# Altium PCB ADA.PcbDoc (part 1 of 3)
Units mm, origin at the board's own origin, x right, y up, seen from the top; angles counter-clockwise.
Board outline 200 x 100 mm, 2 copper layers (Top Layer, Bottom Layer); 139 components, 141 nets, 517 pads, 145 vias.
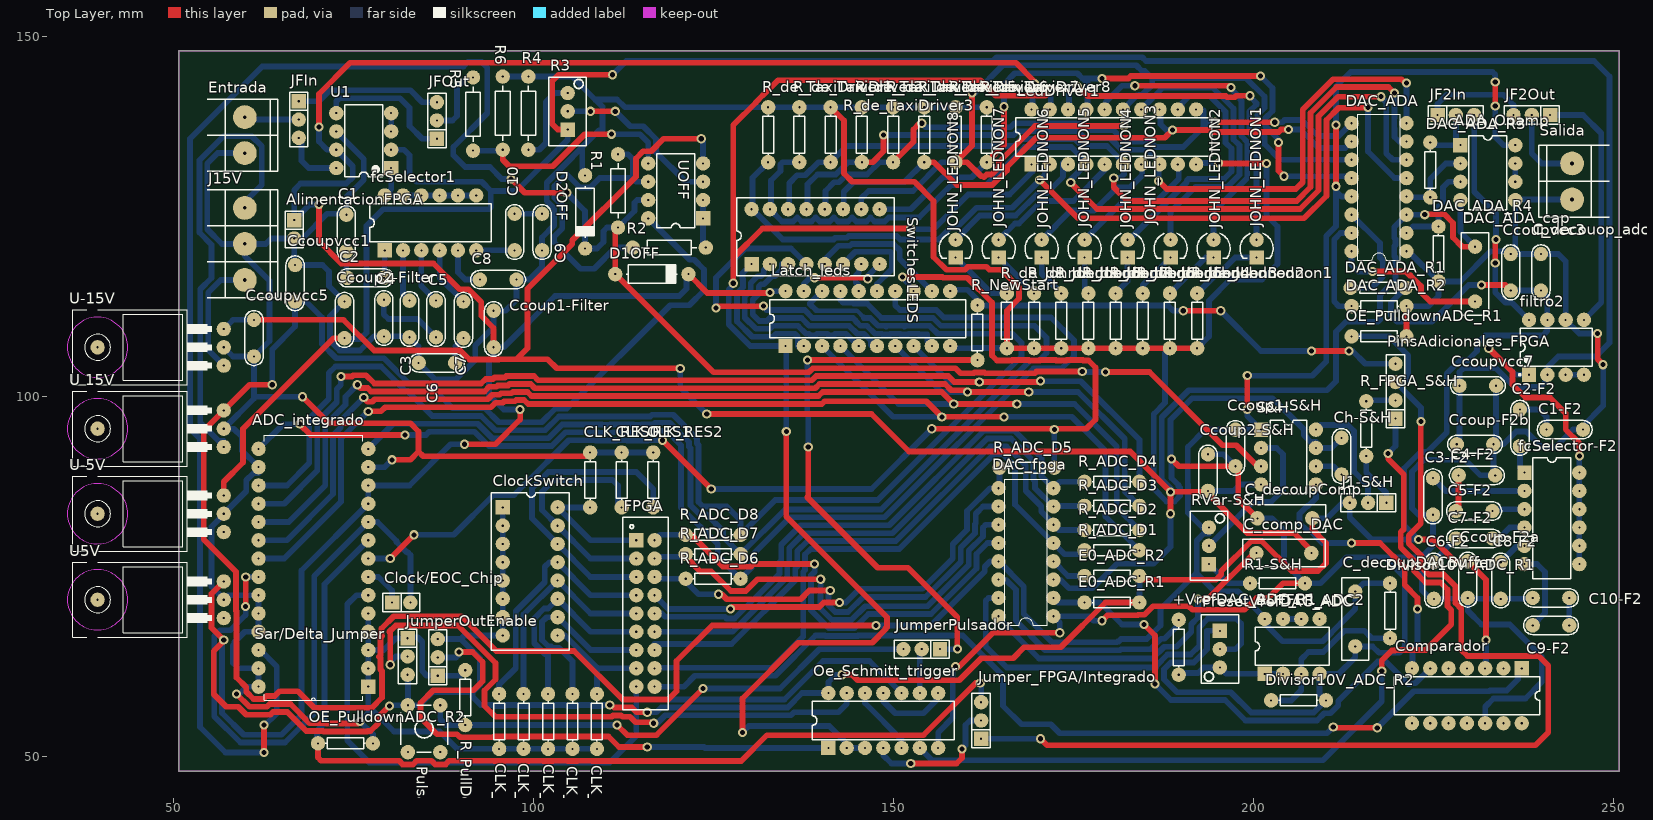
[diagram p0: Top Layer view]
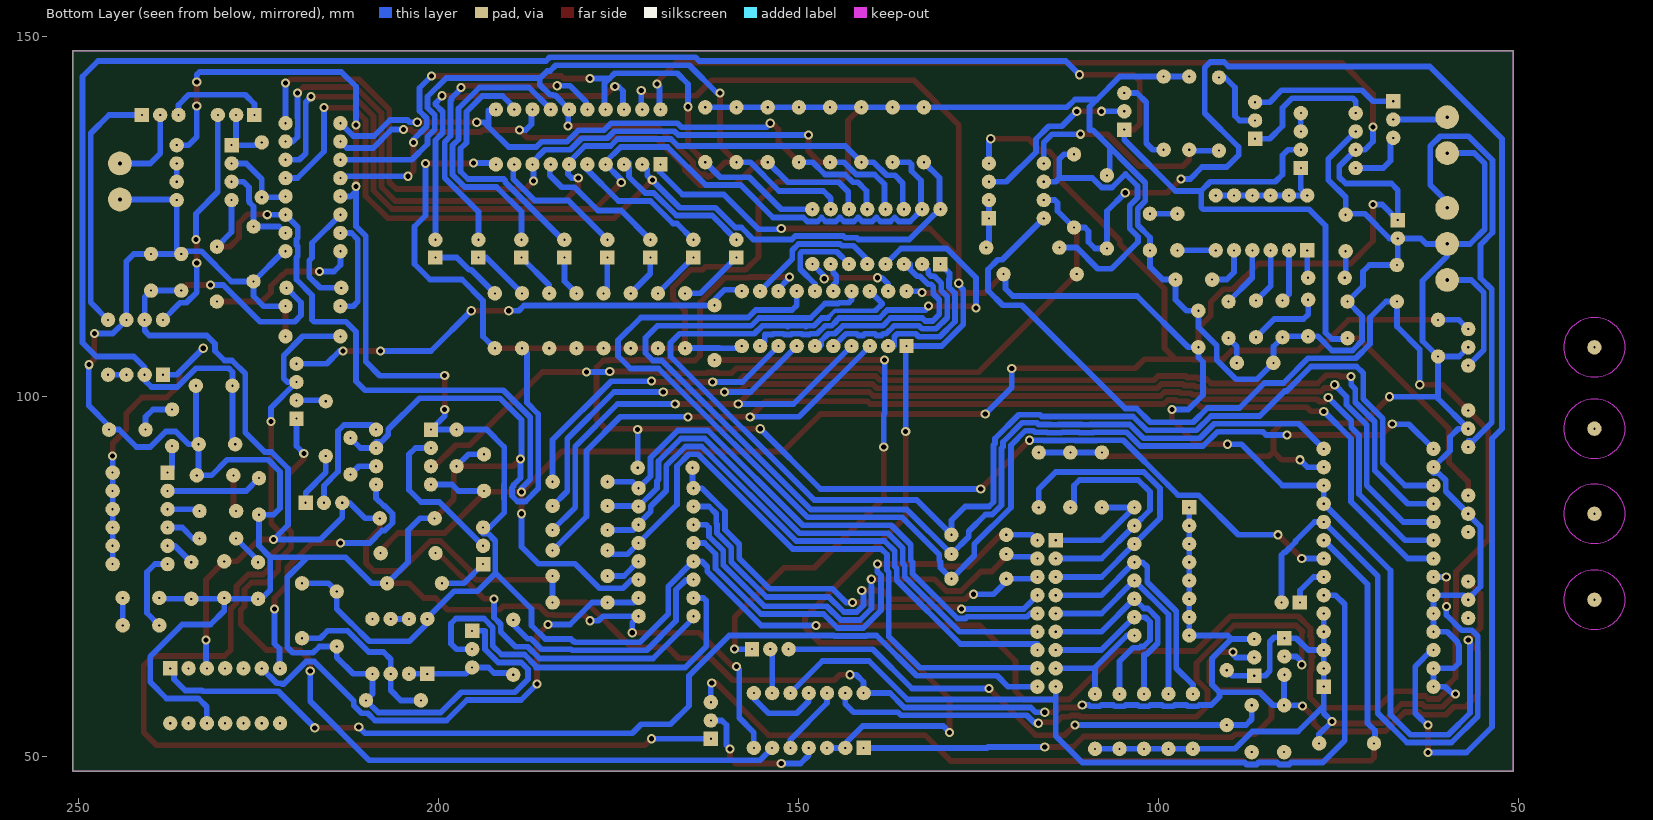
[diagram p1: Bottom Layer view, seen from below]

## Layer stack, top to bottom
Top Solder: solder mask 0.0102, Solder Resist, Dk 3.5
Top Layer: signal copper 0.0356
Dielectric 1: dielectric 0.32, FR-4, Dk 4.8
Bottom Layer: signal copper 0.0356
Bottom Solder: solder mask 0.0102, Solder Resist, Dk 3.5

## Board outline
250.762,47.968 250.762,147.968 50.762,147.968 50.762,47.968

## Design rules (kind name [scope] priority, off if disabled: settings)
Clearance [All] p1: gap=0.3 ignorepadtopadclearanceinfootprint=FALSE
PolygonConnect [All] p1: connectstyle=Relief reliefconductorwidth=0.254 reliefentries=4 polygonreliefangle="90 Angle" airgapwidth=0.254
RoomDefinition Latch-LEDS [InComponentClass('Latch-LEDS')] p1: confinementstyle=ConfineIn formatcopy=TRUE lockcomponents=FALSE outline 205.232,147.955 126.383,147.955 126.383,100 205.232,100
RoomDefinition ADC_FPGA [InComponentClass('ADC_FPGA')] p2: confinementstyle=ConfineIn formatcopy=TRUE lockcomponents=FALSE outline 106.68,48.641 240.665,48.641 240.665,106.426 106.68,106.426
RoomDefinition OFFSET [InComponentClass('OFFSET')] p3: confinementstyle=ConfineIn formatcopy=TRUE lockcomponents=FALSE outline 89.789,148.336 89.789,107.823 129.413,107.823 129.413,148.336
RoomDefinition FR [InComponentClass('FR')] p4: confinementstyle=ConfineIn formatcopy=TRUE lockcomponents=FALSE outline 220.853,66.294 248.412,66.294 248.412,113.665 220.853,113.665
RoomDefinition FAA [InComponentClass('FAA')] p5: confinementstyle=ConfineIn formatcopy=TRUE lockcomponents=FALSE outline 103.886,101.981 103.886,140.843 70.358,140.843 70.358,101.981
RoutingVias [All] p1: holewidth=0.711 width=1.9 viastyle="Through Hole" minholewidth=0.711 minwidth=1.8 maxholewidth=0.711 maxwidth=2
SolderMaskExpansion [All] p1: expansion=0.102
Width [All] p1: maxlimit=0.9 minlimit=0.6 preferedwidth=0.8
30 further rules are at their usual default settings.

## Classes and differential pairs
component class ADC_FPGA: +VrefDAC_ADC_R1 BUFFER_ADC2 C_comp_DAC C_decoupComp C_decoupDACBuffer Ccoup1-S&H Ccoup2-S&H Ch-S&H Comparador Divisor10V_ADC_R1 Divisor10V_ADC_R2 E0_ADC_R1 E0_ADC_R2 FPGA J1-S&H PinsAdicionales_FPGA PresetVrefDAC_ADC R1-S&H R_ADC_D1 R_ADC_D2 R_ADC_D3 R_ADC_D4 R_ADC_D6 R_ADC_D7 R_ADC_D8 R_FPGA_S&H RVar-S&H S&H
component class FAA: C1 C2 C3 C4 C5 C6 C7 C8 C9 C10 Ccoup1-Filter Ccoup2-Filter fcSelector1 U1
component class FR: C1-F2 C2-F2 C3-F2 C4-F2 C5-F2 C6-F2 C7-F2 C8-F2 C9-F2 C10-F2 Ccoup-F2a Ccoup-F2b fcSelector-F2 filtro2
component class Latch-LEDS: JOHN_LEDNON1 JOHN_LEDNON2 JOHN_LEDNON3 JOHN_LEDNON4 JOHN_LEDNON5 JOHN_LEDNON6 JOHN_LEDNON7 JOHN_LEDNON8 Latch_leds LedDriver1 R_de_JohnLednon1 R_de_JohnLednon2 R_de_JohnLednon3 R_de_JohnLednon4 R_de_JohnLednon5 R_de_JohnLednon6 R_de_JohnLednon7 R_de_JohnLednon8 R_de_TaxiDriver1 R_de_TaxiDriver2 R_de_TaxiDriver3 R_de_TaxiDriver4 R_de_TaxiDriver5 R_de_TaxiDriver6 R_de_TaxiDriver7 R_de_TaxiDriver8 SwitchesLEDS
component class OFFSET: D1OFF D2OFF R1 R2 R3 R4 R5 R6 UOFF
component class Placa_ADA: ADA_Opamp ADC_integrado AlimentacionFPGA C_decouop_adc_chip Ccoupvcc1 Ccoupvcc3 Ccoupvcc5 Ccoupvcc7 CLK_RES0 CLK_RES1 CLK_RES2 CLK_RES3 CLK_RES4 CLK_RES5 CLK_RES6 CLK_RES7 Clock/EOC_Chip ClockSwitch DAC_ADA DAC_ADA_cap DAC_ADA_R1 DAC_ADA_R2 DAC_ADA_R3 DAC_ADA_R4 Entrada J15V JF2In JF2Out JFIn JFOut Jumper_FPGA/Integrado JumperOutEnable JumperPulsador OE_PulldownADC_R1 OE_PulldownADC_R2 Oe_Schmitt_trigger PulsadorStart R_NewStart R_PullDownPulsador Salida Sar/Delta_Jumper U5V U15V "U 15V" U-5V U-15V

## Components (designator, comment, footprint, x,y, rotation, side; value= is the part's Value field where it differs from the comment)
+VrefDAC_ADC_R1 "Res1" AXIAL-0.3 189.611,65.151 r270 top value=4.7K
ADA_Opamp "TL082JG" JG008 232.537,131.064 r270 top
ADC_integrado "ADC0809CCN" *DIP254P1524X483-28 61.849,92.71 r180 top
AlimentacionFPGA "CON2" SIP2 66.802,123.19 r270 top
BUFFER_ADC2 "TL082JG" JG008 205.359,65.278 r0 top
C1 "330pF" CAP200 74.041,122.682 r270 top
C1-F2 "330pF" CAP200 243.205,95.377 r180 top
C2 "680pF" CAP200 76.708,116.459 r0 top
C2-F2 "680pF" CAP200 236.982,95.631 r270 top
C3 "150pF" CAP200 82.804,110.744 r90 top
C3-F2 "150pF" CAP200 224.917,86.106 r90 top
C4 "150pF" CAP200 79.248,110.871 r90 top
C4-F2 "150pF" CAP200 231.013,89.027 r180 top
C5 "220pF" CAP200 86.487,110.744 r90 top
C5-F2 "220pF" CAP200 230.632,84.074 r0 top
C6 "330pF" CAP200 86.614,104.648 r0 top
C6-F2 "330pF" CAP200 225.044,74.422 r90 top
C7 "82pF" CAP200 90.297,110.617 r90 top
C7-F2 "82pF" CAP200 230.632,80.264 r0 top
C8 "47pF" CAP200 95.123,116.205 r180 top
C8-F2 "47pF" CAP200 234.315,74.422 r90 top
C9 "27pF" CAP200 101.219,122.809 r90 top
C9-F2 "150nF" CAP200 241.3,68.199 r180 top
C10 "150nF" CAP200 97.409,122.809 r270 top
C10-F2 "27pF" CAP200 241.3,72.009 r0 top
C_comp_DAC "Cap" RAD-0.3 204.216,78.232 r180 top value=10nF
C_decouop_adc_chip "10nf" CAP200 239.903,117.221 r270 top
C_decoupComp "Cap" RAD-0.3 204.343,83.058 r180 top value=100nF
C_decoupDACBuffer "Cap" RAD-0.3 214.122,69.088 r90 top value=100nF
Ccoup1-Filter "100nF" CAP200 94.488,109.347 r270 top
Ccoup1-S&H "CAP" CAP200 197.485,92.837 r270 top
Ccoup2-Filter "100nF" CAP200 73.787,110.617 r270 top
Ccoup2-S&H "CAP" CAP200 193.675,89.408 r90 top
Ccoup-F2a "100nF" CAP200 229.743,74.549 r90 top
Ccoup-F2b "100nF" CAP200 230.759,93.345 r180 top
Ccoupvcc1 "100nF" CAP200 66.929,115.697 r90 top
Ccoupvcc3 "100nF" CAP200 235.712,117.221 r90 top
Ccoupvcc5 "1uF" CAP200 61.214,108.077 r270 top
Ccoupvcc7 "1uF" CAP200 231.14,101.473 r0 top
Ch-S&H "CAP" CAP200 212.217,91.694 r90 top
CLK_RES0 "Res1" AXIAL-0.3 107.886,88.392 r90 top value=1K
CLK_RES1 "Res1" AXIAL-0.3 112.268,88.392 r90 top value=1K
CLK_RES2 "Res1" AXIAL-0.3 116.649,88.392 r90 top value=1K
CLK_RES3 "Res1" AXIAL-0.3 95.25,54.864 r270 top value=1K
CLK_RES4 "Res1" AXIAL-0.3 98.647,54.864 r270 top value=1K
CLK_RES5 "Res1" AXIAL-0.3 102.044,54.864 r270 top value=1K
CLK_RES6 "Res1" AXIAL-0.3 105.442,54.864 r270 top value=1K
CLK_RES7 "Res1" AXIAL-0.3 108.839,54.864 r270 top value=1K
Clock/EOC_Chip "CON2" SIP2 81.661,71.374 r0 top
ClockSwitch "SW-DIP8" DIP-16-KEY 95.758,84.582 r270 top
Comparador "LM339AJ" J014 229.616,58.42 r180 top
D1OFF "DIODO" DO41 116.459,116.967 r0 top
D2OFF "DIODO" DO41 107.188,125.603 r270 top
DAC_ADA "DAC0800" *DIL16 217.424,129.032 r90 top
DAC_ADA_cap "Cap" RAD-0.3 230.759,116.967 r90 top value=10nF
DAC_ADA_R1 "Res1" AXIAL-0.3 217.297,115.062 r180 top value=5K
DAC_ADA_R2 "Res1" AXIAL-0.3 217.424,112.522 r0 top value=5K
DAC_ADA_R3 "Res1" AXIAL-0.3 224.536,131.445 r90 top value=5K
DAC_ADA_R4 "Res1" AXIAL-0.3 225.679,119.761 r90 top value=5K
DAC_fpga "DAC0800" *DIL16 168.402,78.359 r90 top
Divisor10V_ADC_R1 "Res1" AXIAL-0.3 218.948,70.231 r90 top value=1K
Divisor10V_ADC_R2 "Res1" AXIAL-0.3 206.248,57.785 r180 top value=2K
E0_ADC_R1 "Res1" AXIAL-0.3 180.34,71.374 r180 top value=4K7
E0_ADC_R2 "Res1" AXIAL-0.3 180.34,75.057 r180 top value=4K7
Entrada "BORNERA 2" BORNERA2 59.944,136.271 r180 top
fcSelector1 "SW DIP-6" DIP-12/SW 85.725,124.079 r0 top
fcSelector-F2 "SW DIP-6" DIP-12/SW 241.427,83.058 r270 top
filtro2 "MAX297CPA+" MAXM-P8+2 242.062,106.807 r90 top
FPGA "CON9*2" SIP9*2 114.3,80.01 r270 top
J1-S&H "JUMPER" JUMPER3 215.9,85.217 r180 top
J15V "ALIMENTACION" BORNERA3 59.944,121.158 r180 top
JF2In "JUMPER" JUMPER3 228.092,139.065 r0 top
JF2Out "JUMPER" JUMPER3 238.633,139.065 r180 top
JFIn "JUMPER" JUMPER3 67.437,138.43 r270 top
JFOut "JUMPER" JUMPER3 86.614,138.303 r90 top
JOHN_LEDNON1 "LED" LED3 200.424,120.523 r270 top
JOHN_LEDNON2 "LED" LED3 194.455,120.523 r270 top
JOHN_LEDNON3 "LED" LED3 188.486,120.523 r270 top
JOHN_LEDNON4 "LED" LED3 182.517,120.523 r270 top
JOHN_LEDNON5 "LED" LED3 176.548,120.523 r270 top
JOHN_LEDNON6 "LED" LED3 170.579,120.523 r270 top
JOHN_LEDNON7 "LED" LED3 164.61,120.523 r270 top
JOHN_LEDNON8 "LED" LED3 158.641,120.523 r270 top
Jumper_FPGA/Integrado "JUMPER" JUMPER3 162.179,54.991 r90 top
JumperOutEnable "JUMPER" JUMPER3 86.741,63.754 r90 top
JumperPulsador "JUMPER" JUMPER3 153.924,64.897 r180 top
Latch_leds "MC74HC373AN" 738-03 146.449,110.795 r0 top
LedDriver1 "SN74LS244N" 738-03 180.594,136.017 r0 top
OE_PulldownADC_R1 "Res1" AXIAL-0.3 217.424,108.331 r180 top value=1K
OE_PulldownADC_R2 "Res1" AXIAL-0.3 73.914,51.816 r180 top value=1K
Oe_Schmitt_trigger "MC74HC14AN" 646-06 148.59,54.991 r0 top
PinsAdicionales_FPGA "CON4" SIP4 219.71,100.711 r90 top
PresetVrefDAC_ADC "50K" "PRESET V" 195.326,64.897 r270 top
PulsadorStart "TACT SWITCH" TACTSWITCH 84.836,53.848 r0 top
R1 "4K7" RES400 111.76,123.444 r90 top
R1-S&H "Res1" AXIAL-0.3 203.327,74.041 r180 top value=1K
R2 "4K7" RES400 113.792,120.65 r0 top
R3 "PRESET10K" "PRESET V" 104.775,139.573 r90 top
R4 "4K7" RES400 99.314,144.399 r270 top
R5 "4K7" RES400 91.63,134.112 r90 top
R6 "4K7" RES400 95.758,144.399 r270 top
R_ADC_D1 "Res1" AXIAL-0.3 180.34,78.613 r180 top value=100
R_ADC_D2 "Res1" AXIAL-0.3 180.34,81.432 r180 top value=100
R_ADC_D3 "Res1" AXIAL-0.3 180.34,84.785 r180 top value=100
R_ADC_D4 "Res1" AXIAL-0.3 180.34,88.138 r180 top value=100
R_ADC_D5 "Res1" AXIAL-0.3 168.529,90.083 r180 top value=100
R_ADC_D6 "Res1" AXIAL-0.3 124.968,74.676 r180 top value=100
R_ADC_D7 "Res1" AXIAL-0.3 124.968,78.105 r180 top value=100
R_ADC_D8 "Res1" AXIAL-0.3 124.968,80.772 r180 top value=100
R_de_JohnLednon1 "Res1" AXIAL-0.3 192.169,110.49 r270 top value=1K
R_de_JohnLednon2 "Res1" AXIAL-0.3 188.395,110.49 r270 top value=1K
R_de_JohnLednon3 "Res1" AXIAL-0.3 184.622,110.49 r270 top value=1K
R_de_JohnLednon4 "Res1" AXIAL-0.3 180.848,110.49 r270 top value=1K
R_de_JohnLednon5 "Res1" AXIAL-0.3 177.074,110.49 r270 top value=1K
R_de_JohnLednon6 "Res1" AXIAL-0.3 173.301,110.49 r270 top value=1K
R_de_JohnLednon7 "Res1" AXIAL-0.3 169.527,110.49 r270 top value=1K
R_de_JohnLednon8 "Res1" AXIAL-0.3 165.753,110.49 r270 top value=1K
R_de_TaxiDriver1 "Res1" AXIAL-0.3 132.606,136.322 r90 top value=1K
R_de_TaxiDriver2 "Res1" AXIAL-0.3 136.942,136.322 r90 top value=1K
R_de_TaxiDriver3 "Res1" AXIAL-0.3 141.278,136.322 r90 top value=1K
R_de_TaxiDriver4 "Res1" AXIAL-0.3 145.615,136.322 r90 top value=1K
R_de_TaxiDriver5 "Res1" AXIAL-0.3 149.951,136.322 r90 top value=1K
R_de_TaxiDriver6 "Res1" AXIAL-0.3 154.287,136.322 r90 top value=1K
R_de_TaxiDriver7 "Res1" AXIAL-0.3 158.623,136.322 r90 top value=1K
R_de_TaxiDriver8 "Res1" AXIAL-0.3 162.959,136.322 r90 top value=1K
R_FPGA_S&H "Res1" AXIAL-0.3 215.646,95.504 r90 top value=100
R_NewStart "Res1" AXIAL-0.3 161.671,108.839 r270 top value=100
R_PullDownPulsador "Res1" AXIAL-0.3 90.551,58.166 r90 top value=1K
RVar-S&H "PRESET" "PRESET V" 193.802,79.248 r90 top
S&H "LF398" DIP8 201.041,95.377 r0 top
Salida "BORNERA 2" BORNERA2 244.221,129.834 r0 top
Sar/Delta_Jumper "JUMPER" JUMPER3 82.55,63.881 r270 top
SwitchesLEDS "SW DIP-8" DIP-16-KEY 130.302,118.364 r0 top
U1 "MAX297CPA+" MAXM-P8+2 76.454,135.509 r180 top
U5V "LM7805" *TO220 50.673,71.755 r90 top
"U 15V" "LM7815" *TO220 50.673,95.504 r90 top
U-5V "LM7905" *TO220 50.673,83.693 r90 top
U-15V "LM7915" *TO220 50.673,106.807 r90 top
UOFF "TL082JG" JG008 119.761,128.524 r90 top

## Footprints (in the part's own frame and the unit in brackets; to place one, negate y for a bottom-side part, rotate by r counter-clockwise, add the part's x,y. Pads: shape width x height; smd on the part's side, far side on the other; paste and mask are expansions set on the pad)
646-06 [mm] "DIP; 14 Leads; Row Spacing 7.62 mm; Pitch 2.54 mm"
  rect 2x2 hole 0.3: 1(-7.62,-3.81)
  round 2 hole 0.3: 2(-5.08,-3.81) 3(-2.54,-3.81) 4(0,-3.81) 5(2.54,-3.81) 6(5.08,-3.81) 7(7.62,-3.81) 8(7.62,3.81) 9(5.08,3.81) 10(2.54,3.81) 11(0,3.81) 12(-2.54,3.81) 13(-5.08,3.81) 14(-7.62,3.81)
  silkscreen extent -9.85,-2.65 9.85,2.65
738-03 [mm] "DIP; 20 Leads; Row Spacing 7.62 mm; Pitch 2.54 mm"
  rect 2x2 hole 0.3: 1(-11.43,-3.81)
  round 2 hole 0.3: 2(-8.89,-3.81) 3(-6.35,-3.81) 4(-3.81,-3.81) 5(-1.27,-3.81) 6(1.27,-3.81) 7(3.81,-3.81) 8(6.35,-3.81) 9(8.89,-3.81) 10(11.43,-3.81) 11(11.43,3.81) 12(8.89,3.81) 13(6.35,3.81) 14(3.81,3.81) 15(1.27,3.81) 16(-1.27,3.81) 17(-3.81,3.81) 18(-6.35,3.81) 19(-8.89,3.81) 20(-11.43,3.81)
  silkscreen extent -13.6,-2.65 13.6,2.65
*DIL16 [mm]
  round 2 hole 0.3: 1(-8.89,-3.81) 2(-6.35,-3.81) 3(-3.81,-3.81) 4(-1.27,-3.81) 5(1.27,-3.81) 6(3.81,-3.81) 7(6.35,-3.81) 8(8.89,-3.81) 9(8.89,3.81) 10(6.35,3.81) 11(3.81,3.81) 12(1.27,3.81) 13(-1.27,3.81) 14(-3.81,3.81) 15(-6.35,3.81) 16(-8.89,3.81)
  silkscreen extent -10.16,-2.92 10.16,2.92
*DIP254P1524X483-28 [mm]
  rect 2x2 hole 0.3: 1(-15.24,33.02)
  round 2 hole 0.3: 2(-15.24,30.48) 3(-15.24,27.94) 4(-15.24,25.4) 5(-15.24,22.86) 6(-15.24,20.32) 7(-15.24,17.78) 8(-15.24,15.24) 9(-15.24,12.7) 10(-15.24,10.16) 11(-15.24,7.62) 12(-15.24,5.08) 13(-15.24,2.54) 14(-15.24,0) 15(0,0) 16(0,2.54) 17(0,5.08) 18(0,7.62) 19(0,10.16) 20(0,12.7) 21(0,15.24) 22(0,17.78) 23(0,20.32) 24(0,22.86) 25(0,25.4) 26(0,27.94) 27(0,30.48) 28(0,33.02)
  silkscreen extent -14.48,-1.91 -0.76,34.92
*TO220 [mm]
  round 2 hole 0.3: 1(-2.54,-6.35) 2(0,-6.35) 3(2.54,-6.35)
  round 2 hole 0.3 unplated: None(0,11.176)
  Keep-Out Layer circle w0: c0,11.176 r4.191
  Keep-Out Layer circle w0: c0,11.176 r4.191
  Keep-Out Layer circle w0: c0,11.176 r4.191
  Keep-Out Layer circle w0: c0,11.176 r4.191
  Keep-Out Layer circle w0: c0,11.176 r4.191
  Keep-Out Layer circle w0: c0,11.176 r4.191
  silkscreen extent -5.21,-4.7 5.21,14.6
AXIAL-0.3 [mm] "Axial Device, Thru-Hole; 2 Leads; 0.3 in Pin Spacing"
  round 2 hole 0.3: 1(-3.81,0) 2(3.81,0)
  silkscreen extent -2.77,-0.76 2.77,0.76
BORNERA2 [mm] "Bornera con Tornillos 5mm separación"
  round 3.3 hole 0.5: 1(0,2.5) 2(0,-2.5)
  silkscreen extent -4.6,-5 5.2,5, body extent -3.76,-4.89 3.94,5.61, height 10
BORNERA3 [mm] "Bornera con Tornillos 5mm separación"
  round 3.3 hole 0.5: 1(0,5) 2(0,0) 3(0,-5)
  silkscreen extent -4.6,-7.5 5.2,7.5, body extent -3.76,-7.39 3.94,8.11, height 10.05
CAP200 [mm]
  round 2 hole 0.3: 1(-2.54,0) 2(2.54,0)
  silkscreen extent -3.81,-1.27 3.81,1.27, body extent -2.79,-1.17 2.79,1.12, height 6.24
DIP8 [mm]
  rect 2x2 hole 0.3: 1(0,0)
  round 2 hole 0.3: 2(0,-2.54) 3(0,-5.08) 4(0,-7.62) 5(7.62,-7.62) 6(7.62,-5.08) 7(7.62,-2.54) 8(7.62,0)
  silkscreen extent 1.27,-8.89 6.35,1.27, body extent -0.06,-9.21 7.7,1.59, height 4.5
DIP-12/SW [mm] "DIP Switch; 12 Leads"
  rect 2x2 hole 0.3: 1(-6.35,-3.81)
  round 2 hole 0.3: 2(-3.81,-3.81) 3(-1.27,-3.81) 4(1.27,-3.81) 5(3.81,-3.81) 6(6.35,-3.81) 7(6.35,3.81) 8(3.81,3.81) 9(1.27,3.81) 10(-1.27,3.81) 11(-3.81,3.81) 12(-6.35,3.81)
  silkscreen extent -8.43,-2.65 8.41,2.65
DIP-16-KEY [mm] "DIP; 16 Leads; Row Spacing 7.62 mm; Pitch 2.54 mm"
  rect 2x2 hole 0.3: 1(0,0)
  round 2 hole 0.3: 2(2.54,0) 3(5.08,0) 4(7.62,0) 5(10.16,0) 6(12.7,0) 7(15.24,0) 8(17.78,0) 9(17.78,7.62) 10(15.24,7.62) 11(12.7,7.62) 12(10.16,7.62) 13(7.62,7.62) 14(5.08,7.62) 15(2.54,7.62) 16(0,7.62)
  silkscreen extent -2.05,-1.59 19.83,9.2
DO41 [mm]
  round 2 hole 0.3: 1(-5.08,0) 2(5.08,0)
  silkscreen extent -3.56,-1.27 3.56,1.27, body extent -5.46,-1.19 5.46,1.37, height 2.03
J014 [mm] "DIP; 14 Leads; Row Spacing 7.62 mm; Pitch 2.54 mm"
  rect 2x2 hole 0.3: 1(-7.62,-3.81)
  round 2 hole 0.3: 2(-5.08,-3.81) 3(-2.54,-3.81) 4(0,-3.81) 5(2.54,-3.81) 6(5.08,-3.81) 7(7.62,-3.81) 8(7.62,3.81) 9(5.08,3.81) 10(2.54,3.81) 11(0,3.81) 12(-2.54,3.81) 13(-5.08,3.81) 14(-7.62,3.81)
  silkscreen extent -10.1,-2.65 10.1,2.65, body extent -9.97,-3.93 9.97,3.93, height 5.08
JG008 [mm] "DIP; 8 Leads; Row Spacing 7.62 mm; Pitch 2.54 mm"
  rect 2x2 hole 0.3: 1(-3.81,-3.81)
  round 2 hole 0.3: 2(-1.27,-3.81) 3(1.27,-3.81) 4(3.81,-3.81) 5(3.81,3.81) 6(1.27,3.81) 7(-1.27,3.81) 8(-3.81,3.81)
  silkscreen extent -5.15,-2.65 5.15,2.65
JUMPER3 [mm]
  rect 2x2 hole 0.3: 1(-2.54,0)
  round 2 hole 0.3: 2(0,0) 3(2.54,0)
  silkscreen extent -3.81,-1.27 3.81,1.27, body extent -3.81,-1.3 3.81,1.27, height 16.15
LED3 [mm]
  round 2 hole 0.3: 1(-1.219,0)
  rect 2x2 hole 0.3: 2(1.245,0)
  silkscreen extent -2.13,-2.3 1.36,2.3, body extent -1.65,-1.63 1.65,1.66, height 0.49
MAXM-P8+2 [mm] "DIP, 8-Leads, Body 9.375x6.985mm, Pitch 2.54mm"
  rect 2x2 hole 0.3: 1(-3.81,3.81)
  round 2 hole 0.3: 2(-3.81,1.27) 3(-3.81,-1.27) 4(-3.81,-3.81) 5(3.81,-3.81) 6(3.81,-1.27) 7(3.81,1.27) 8(3.81,3.81)
  silkscreen extent -3.93,-5 2.65,5.23, body extent -3.95,-4.95 3.95,4.95, height 4.58
"PRESET V" [mm]
  rect 2x2 hole 0.3: 1(-2.54,0)
  round 2 hole 0.3: 2(0,0) 3(2.54,0)
  silkscreen extent -4.76,-2.6 4.76,2.6, body extent -4.7,-2.42 4.83,2.42, height 11.55
RAD-0.3 [mm] "Radial Cap, Thru-Hole; 2 Leads; 0.3 in Pin Spacing"
  round 2 hole 0.3: 1(-3.81,0) 2(3.81,0)
  silkscreen extent -5.71,-1.91 5.71,1.91
RES400 [mm]
  round 2 hole 0.3: 1(0,0) 2(10.16,0)
  silkscreen extent 1.27,-1.02 8.89,1.02, body extent -0.3,-1.14 10.46,1.17, height 2.43
SIP2 [mm]
  rect 2x2 hole 0.3: 1(-1.27,0)
  round 2 hole 0.3: 2(1.27,0)
  silkscreen extent -2.54,-1.27 2.54,1.27
SIP4 [mm]
  rect 2x2 hole 0.3: 1(-3.81,0)
  round 2 hole 0.3: 2(-1.27,0) 3(1.27,0) 4(3.81,0)
  silkscreen extent -5.08,-1.27 5.08,1.27, body extent -5.08,-1.27 5.08,1.27, height 8.38
SIP9*2 [mm]
  rect 2x2 hole 0.3: 1(0,0)
  round 2 hole 0.3: 2(0,2.54) 3(2.54,0) 4(2.54,2.54) 5(5.08,0) 6(5.08,2.54) 7(7.62,0) 8(7.62,2.54) 9(10.16,0) 10(10.16,2.54) 11(12.7,0) 12(12.7,2.54) 13(15.24,0) 14(15.24,2.54) 15(17.78,0) 16(17.78,2.54) 17(20.32,0) 18(20.32,2.54)
  silkscreen extent -3.18,-1.91 23.49,4.45, body extent -1.26,-1.3 21.6,3.78, height 10.1
TACTSWITCH [mm]
  round 2 hole 0.3: 1(-2.25,-3.25) 2(-2.25,3.25) 3(2.25,-3.25) 4(2.25,3.25)
  silkscreen extent -3.25,-3.25 3.25,3.25, body extent -3.05,-3.95 3.15,3.95, height 7

## Part data
+VrefDAC_ADC_R1 CLK_RES0 CLK_RES1 CLK_RES2 CLK_RES3 CLK_RES4 CLK_RES5 CLK_RES6 CLK_RES7 DAC_ADA_R1 DAC_ADA_R2 DAC_ADA_R3 DAC_ADA_R4 Divisor10V_ADC_R1 Divisor10V_ADC_R2 E0_ADC_R1 E0_ADC_R2 OE_PulldownADC_R1 OE_PulldownADC_R2 R1-S&H R_ADC_D1 R_ADC_D2 R_ADC_D3 R_ADC_D4 R_ADC_D5 R_ADC_D6 R_ADC_D7 R_ADC_D8 R_de_JohnLednon1 R_de_JohnLednon2 R_de_JohnLednon3 R_de_JohnLednon4 R_de_JohnLednon5 R_de_JohnLednon6 R_de_JohnLednon7 R_de_JohnLednon8 R_de_TaxiDriver1 R_de_TaxiDriver2 R_de_TaxiDriver3 R_de_TaxiDriver4 R_de_TaxiDriver5 R_de_TaxiDriver6 R_de_TaxiDriver7 R_de_TaxiDriver8 R_FPGA_S&H R_NewStart R_PullDownPulsador: "Resistor", LatestRevisionDate=17-Jul-2002, LatestRevisionNote="Re-released for DXP Platform.", PackageDescription="Axial Device, Thru-Hole; 2 Leads; 0.3 in Pin Spacing", PackageReference=AXIAL-0.3, Published=8-Jun-2000, Publisher="Altium Limited"
ADA_Opamp BUFFER_ADC2 UOFF: "JFET-Input Operational Amplifier", ComponentLink1Description="Manufacturer Link", ComponentLink1URL=http://www.ti.com/, ComponentLink2Description=Datasheet, ComponentLink2URL=http://www-s.ti.com/sc/ds/tl082.pdf, DatasheetVersion=Feb-1999, LatestRevisionDate=04-Mar-2005, LatestRevisionNote="Stylized 3D Model Added.", PackageDescription="DIP; 8 Leads; Row Spacing 7.62 mm; Pitch 2.54 mm", PackageReference=JG008, PackageVersion=Jan-1995, Published=16-Jan-2001, Publisher="Altium Limited"
ADC_integrado: "8-bit Microprocessor Compatible A/D Converters With 8-Channel Multiplexer 28-PDIP -40 to 85", Package="DIP-28 Texas Instruments", Availability=Unavailable, MF="Texas Instruments", MP=ADC0809CCN/NOPB, Price=None, SnapEDA_Link=https://www.snapeda.com/parts/ADC0809CCN/NOPB/Texas%20Instruments/view-part/?ref=snap
C1 C1-F2 C2 C2-F2 C3 C3-F2 C4 C4-F2 C5 C5-F2 C6 C6-F2 C7 C7-F2 C8 C8-F2 C9 C9-F2 C10 C10-F2 C_decouop_adc_chip Ccoup1-Filter Ccoup2-Filter Ccoup-F2a Ccoup-F2b Ccoupvcc1 Ccoupvcc3 Ccoupvcc5 Ccoupvcc7: library part CAP
C_comp_DAC C_decoupComp C_decoupDACBuffer DAC_ADA_cap: "Capacitor", LatestRevisionDate=17-Jul-2002, LatestRevisionNote="Re-released for DXP Platform.", PackageDescription="Radial Cap, Thru-Hole; 2 Leads; 0.3 in Pin Spacing", PackageReference=RAD-0.3, Published=8-Jun-2000, Publisher="Altium Limited"
ClockSwitch: "4009 Series DIP Switch, Raised actuator", ComponentLink1Description="Manufacturer Link", ComponentLink1URL=http://www.oupiin.com/prodindx.html#Headers, LatestRevisionDate=17-Dec-2003, LatestRevisionNote="PCB Footprint replaced.", PackageDescription="DIP; 16 Leads; Row Spacing 7.62 mm; Pitch 2.54 mm", PackageReference=DIP-16-KEY, Published=24-Mar-1999, Publisher="Altium Limited"
Comparador: "Quad Differential Comparator", ComponentLink1Description="Manufacturer Link", ComponentLink1URL=http://www.ti.com/, ComponentLink2Description=Datasheet, ComponentLink2URL=http://www-s.ti.com/sc/ds/lm139a.pdf, DatasheetVersion=Apr-1988, LatestRevisionDate=04-Mar-2005, LatestRevisionNote="Stylized 3D Model Added.", PackageDescription="DIP; 14 Leads; Row Spacing 7.62 mm; Pitch 2.54 mm", PackageReference=J014, PackageVersion=Jun-1999, Published=15-Apr-2002, Publisher="Altium Limited"
DAC_ADA DAC_fpga: Package="SOIC-16 Texas Instruments", Digi-Key_Part_Number=DAC0800LCN/NOPB-ND, Digi-Key_Purchase_URL=https://www.digikey.com.ar/product-detail/en/texas-instruments/DAC0800LCN-NOPB/DAC0800LCN-NOPB-ND/4652?utm_source=snapeda&utm_medium=aggregator&utm_campaign=symbol, MF="Texas Instruments", MP=DAC0800, SnapEDA_Link=https://www.snapeda.com/parts/DAC0800/Texas%20Instruments/view-part/?ref=snap
fcSelector1 fcSelector-F2: "DIP Switch, 6 Position, SPST", LatestRevisionDate=17-Jul-2002, LatestRevisionNote="Re-released for DXP Platform.", PackageDescription="DIP Switch; 12 Leads", PackageReference=DIP-12/SW, Published=24-Mar-1999, Publisher="Altium Limited"
filtro2 U1: "8th-Order Switched Capacitor Lowpass Filter, Elliptic, 1.5 Transition Ratio, 0 to 70 degC, 8-Pin DIP (P8+2), Pb-Free", Generic Part Number=MAX297, Supplier Part Number 1=MAX297CPA+-ND, Code_JEDEC=MS001-XX, ComponentLink1Description="Manufacturer URL", ComponentLink1URL=http://www.maximintegrated.com/, ComponentLink2Description=Datasheet, ComponentLink2URL=http://datasheets.maximintegrated.com/en/ds/MAX293-MAX297.pdf, ComponentLink3Description="Package Specification", ComponentLink3URL=http://pdfserv.maximintegrated.com/package_dwgs/21-0043.PDF, DatasheetVersion="Rev. 2", Filter Characteristic=Elliptic, Filter Class="Switched Cap", Filter Sections=1, Filter Type=Lowpass, Mounting Technology="Through Hole", Order Per Filter Section=8, PackageDescription="8-Pin Plastic Dual-In-Line, Narrow (0.3in) (P8+2), Body 9.375 x 6.985 mm, Pitch 2.54 mm", PackageReference=P8+2, PackageVersion="Rev. E, 04/2011", PartNumber=MAX297CPA+, Program Method=Clock, RoHS=Pb-Free, Supplier 1=Digi-Key, Supplier 2=Mouser, Supplier Part Number 2=700-MAX297CPA
J1-S&H JF2In JF2Out JFIn JFOut Jumper_FPGA/Integrado JumperOutEnable JumperPulsador Sar/Delta_Jumper: library part JUMPER3
J15V: library part "BORNERA 3"
Latch_leds: "Octal 3-State Non-Inverting Transparent Latch", Code_JEDEC=MS-001-AD, ComponentLink1Description="Manufacturer Link", ComponentLink1URL=http://www.onsemi.com/, ComponentLink2Description=Datasheet, ComponentLink2URL=http://www.onsemi.com/pub/Collateral/MC74HC373A-D.PDF, DatasheetVersion=Mar-2000, PackageDescription="DIP; 20 Leads; Row Spacing 7.62 mm; Pitch 2.54 mm", PackageReference=738-03, PackageVersion=1996, Published=15-Apr-2002, Publisher="Altium Limited"
LedDriver1: "Octal Buffer/Line Driver with 3-State Outputs", Code_JEDEC=MS-001-AD, ComponentLink1Description="Manufacturer Link", ComponentLink1URL=http://www.onsemi.com/, ComponentLink2Description=Datasheet, ComponentLink2URL=http://www.onsemi.com/pub/Collateral/SN74LS240-D.PDF, DatasheetVersion="Rev. 6, Dec-1999", PackageDescription="DIP; 20 Leads; Row Spacing 7.62 mm; Pitch 2.54 mm", PackageReference=738-03, PackageVersion=1996, Published=15-Apr-2002, Publisher="Altium Limited"
Oe_Schmitt_trigger: "Hex Schmitt-Trigger Inverter", ComponentLink1Description="Manufacturer Link", ComponentLink1URL=http://www.onsemi.com/, ComponentLink2Description=Datasheet, ComponentLink2URL=http://www.onsemi.com/pub/Collateral/MC74HC14A-D.PDF, DatasheetVersion=Mar-2000, PackageDescription="DIP; 14 Leads; Row Spacing 7.62 mm; Pitch 2.54 mm", PackageReference=646-06, PackageVersion=1995, Published=15-Apr-2002, Publisher="Altium Limited"
PresetVrefDAC_ADC R3: library part PRESET
R1 R2 R4 R5 R6: library part RES
S&H: library part LM555, "Sample and Hold Amplifier"
SwitchesLEDS: library part SW-DIP8, "4009 Series DIP Switch, Raised actuator", ComponentLink1Description="Manufacturer Link", ComponentLink1URL=http://www.oupiin.com/prodindx.html#Headers, LatestRevisionDate=17-Dec-2003, LatestRevisionNote="PCB Footprint replaced.", PackageDescription="DIP; 16 Leads; Row Spacing 7.62 mm; Pitch 2.54 mm", PackageReference=DIP-16-KEY, Published=24-Mar-1999, Publisher="Altium Limited"
U5V: Package="TO-220 Texas Instruments", Availability=Unavailable, MF="Texas Instruments", MP=LM7805, Price=None, SnapEDA_Link=https://www.snapeda.com/parts/LM7805/Texas%20Instruments/view-part/?ref=snap
"U 15V" U-5V U-15V: library part LM7805, Package="TO-220 Texas Instruments", Availability=Unavailable, MF="Texas Instruments", MP=LM7805, Price=None, SnapEDA_Link=https://www.snapeda.com/parts/LM7805/Texas%20Instruments/view-part/?ref=snap

## Via types
v1: diameter 1.27, hole 0.711, Top Layer to Bottom Layer, 145 vias

## Nets (pads, with @x,y where several pads share a name; then routed paths per layer and width w, separated by ;. In a path a pad name is that pad's centre, name@x,y a point inside that pad or via, vN(x,y) a via of type N, cw(c..) or ccw(c..) an arc to the next point about the centre after c; other vN are vias at no path point)
10V_ADC: +VrefDAC_ADC_R1.2 BUFFER_ADC2.1 BUFFER_ADC2.2 PresetVrefDAC_ADC.3 | length 14.6
  Bottom Layer w0.8: +VrefDAC_ADC_R1.2@190.246,61.341 190.5,61.595 192.278,61.595 193.04,62.357 PresetVrefDAC_ADC.3@195.326,62.357 196.215,61.468 BUFFER_ADC2.1@201.549,61.468 BUFFER_ADC2.2@204.089,61.468
+5V: ADC_integrado.11 ADC_integrado.12 AlimentacionFPGA.1 C_decouop_adc_chip.2 C_decoupComp.1 Ccoup1-Filter.2 Ccoup-F2a.2 Ccoupvcc3.1 ClockSwitch.1 ClockSwitch.2 ClockSwitch.3 ClockSwitch.4 ClockSwitch.5 ClockSwitch.6 ClockSwitch.7 ClockSwitch.8 Comparador.3 D1OFF.2 DAC_ADA_R1.1 E0_ADC_R1.1 E0_ADC_R2.1 filtro2.7 J1-S&H.3 JumperOutEnable.3 Latch_leds.20 LedDriver1.20 Oe_Schmitt_trigger.14 PulsadorStart.2 Sar/Delta_Jumper.3 U1.7 U5V.3 | length 684.6
  Top Layer w0.8: U5V.3@57.023,74.295 55.323,72.595 55.323,67.867 v1(57.023,66.167) 57.023,66.04 55.626,64.643 55.626,58.642 57.372,56.896 59.023,56.896 60.129,55.79 63.464,55.79 63.851,56.177 65.828,56.177 68.489,53.516 70.808,53.516 70.857,53.467 76.971,53.467 77.02,53.516 77.392,53.516 78.486,54.61 78.486,55.499 v1(80.01,57.023) ; v1(70.231,126.619) 70.231,121.548 73.337,118.442 86.155,118.442 89.74,114.857 91.001,114.857 92.788,113.07 92.788,111.183 94.488,109.483 Ccoup1-Filter.2@94.488,106.807 ; v1(70.231,137.414) 70.231,141.986 74.549,146.304 167.005,146.304 169.672,143.637 v1(169.672,143.383) ; v1(90.424,93.345) 94.742,93.345 98.171,96.774 v1(98.171,98.171) ; v1(110.617,57.15) 110.871,57.15 111.23,56.791 113.675,56.791 114.332,56.134 v1(115.824,56.134) ; D1OFF.2@121.539,116.967 124.144,114.362 132.777,114.362 v1(132.842,114.427) ; v1(142.875,61.341) 144.272,61.341 145.034,60.579 159.131,60.579 162.179,63.627 166.624,63.627 168.148,65.151 173.228,65.151 179.451,71.374 E0_ADC_R1.1@184.15,71.374 ; E0_ADC_R2.1@184.15,75.057 184.658,74.549 194.786,74.549 195.502,75.265 195.502,75.732 199.702,79.932 201.11,79.932 205.301,75.741 208.964,75.741 210.058,76.835 210.058,79.629 208.153,81.534 C_decoupComp.1@208.153,83.058 ; v1(222.885,80.137) 224.917,80.137 227.965,77.089 Ccoup-F2a.2@229.743,77.089 232.283,74.549 v1(232.283,66.167) ; v1(231.648,115.443) 234.95,115.443 Ccoupvcc3.1@235.712,114.681
  Bottom Layer w0.8: v1(57.023,66.167) 56.788,65.932 56.788,56.02 59.787,53.021 65.054,53.021 67.818,55.785 67.818,75.819 ADC_integrado.11@77.089,85.09 ; v1(70.231,126.619) 68.961,126.619 AlimentacionFPGA.1@66.802,124.46 66.802,128.651 67.691,129.54 74.041,129.54 74.93,130.429 74.93,131.953 U1.7@72.644,134.239 71.374,134.239 70.231,135.382 v1(70.231,137.414) ; ADC_integrado.11@77.47,85.471 ADC_integrado.11@77.089,85.09 ; v1@80.085,57.098 PulsadorStart.2@82.586,57.098 ; Sar/Delta_Jumper.3@82.55,61.341 82.586,61.305 PulsadorStart.2@82.586,57.098 ; JumperOutEnable.3@86.741,66.294 89.916,66.294 ; v1@90.17,93.345 88.519,93.345 82.804,87.63 ADC_integrado.12@77.089,87.63 ADC_integrado.11@77.089,85.09 ; ClockSwitch.1@95.758,84.582 ClockSwitch.2@95.758,82.042 ClockSwitch.3@95.758,79.502 ClockSwitch.4@95.758,76.962 ClockSwitch.5@95.758,74.422 ClockSwitch.6@95.758,71.882 ClockSwitch.7@95.758,69.342 ClockSwitch.8@95.758,66.802 90.424,66.802 89.916,66.294 ; v1(98.171,98.171) 95.885,98.171 93.853,100.203 93.853,104.775 94.488,105.41 Ccoup1-Filter.2@94.488,106.807 95.885,106.807 102.997,113.919 120.269,113.919 121.285,114.935 121.285,116.713 D1OFF.2@121.539,116.967 ; v1(110.617,57.15) 109.719,57.15 109.543,56.974 108.135,56.974 107.959,57.15 106.322,57.15 106.146,56.974 104.738,56.974 104.562,57.15 102.925,57.15 102.749,56.974 101.34,56.974 101.164,57.15 99.527,57.15 99.351,56.974 97.943,56.974 97.767,57.15 96.13,57.15 95.954,56.974 94.546,56.974 94.37,57.15 92.71,57.15 91.567,58.293 91.567,58.928 ; v1(115.824,56.134) 117.094,56.134 117.772,56.812 135.33,56.812 137.319,58.801 Oe_Schmitt_trigger.14@140.97,58.801 140.97,60.325 141.986,61.341 v1(142.875,61.341) ; v1(132.842,114.427) 133.02,114.605 Latch_leds.20@135.019,114.605 ; LedDriver1.20@169.309,140.005 169.309,143.02 v1(169.672,143.383) ; E0_ADC_R1.1@184.15,71.374 E0_ADC_R2.1@184.15,74.727 ; C_decoupComp.1@208.153,83.058 210.185,83.058 212.344,85.217 J1-S&H.3@213.36,85.217 213.36,83.185 216.408,80.137 v1(222.885,80.137) 220.896,82.126 220.896,89.991 223.191,92.286 224.112,92.286 226.822,94.996 226.822,103.156 228.652,104.986 229.7,104.986 231.013,106.299 231.013,107.315 232.156,108.458 240.157,108.458 240.792,109.093 filtro2.7@240.792,110.617 240.792,113.792 C_decouop_adc_chip.2@239.903,114.681 Ccoupvcc3.1@235.712,114.681 ; DAC_ADA_R1.1@221.107,115.062 219.075,113.03 219.075,111.252 219.964,110.363 224.79,110.363 229.87,115.443 v1(231.648,115.443) ; Comparador.3@232.156,62.23 232.283,62.357 v1(232.283,66.167) ; PulsadorStart.2@82.586,57.098 84.149,57.098 85.979,58.928 91.567,58.928 ; 89.916,66.294 92.583,63.627 92.583,59.944 91.567,58.928
+15V: "U 15V.3" ADA_Opamp.8 BUFFER_ADC2.8 C_decoupDACBuffer.2 Ccoup1-S&H.1 Ccoupvcc1.1 DAC_ADA.13 DAC_fpga.13 Divisor10V_ADC_R1.2 RVar-S&H.3 S&H.1 UOFF.8 | length 487.6
  Top Layer w0.8: v1(63.754,101.6) 60.579,101.6 57.023,98.044 54.229,95.25 54.229,80.137 58.723,75.643 58.723,71.348 58.723,70.243 58.801,70.165 58.801,60.943 60.149,59.595 60.149,58.986 61.145,57.99 62.553,57.99 62.94,58.377 64.092,58.377 64.77,59.055 67.31,59.055 69.596,56.769 77.597,56.769 78.994,58.166 78.994,61.866 78.789,62.071 78.789,63.64 78.576,63.853 78.789,64.066 78.789,66.47 79.037,66.718 79.037,66.727 78.91,66.854 78.91,67.766 80.613,69.469 90.043,69.469 94.869,64.643 105.664,64.643 112.416,57.891 118.724,57.891 119.888,59.055 119.888,63.246 124.841,68.199 v1(147.574,68.199) ; v1(199.136,98.171) v1(199.136,102.87) ; v1(211.455,129.159) 211.582,129.286 211.455,129.413 v1(211.455,137.668) ; v1(233.553,140.335) v1(233.553,143.637)
  Bottom Layer w0.8: v1(63.754,101.6) 63.754,106.521 66.929,109.696 Ccoupvcc1.1@66.929,113.157 68.453,113.157 70.655,110.955 70.655,107.249 72.627,105.277 79.254,105.277 82.677,101.854 85.312,101.854 88.784,98.382 93.21,98.382 95.201,96.391 101.186,96.391 103.097,98.302 104.652,98.302 118.999,112.649 121.666,112.649 123.698,114.681 123.698,117.602 122.35,118.95 121.715,118.95 UOFF.8@115.951,124.714 ; v1(147.574,68.199) 155.194,68.199 162.687,75.692 162.687,76.327 163.449,77.089 DAC_fpga.13@164.592,77.089 164.624,77.089 168.105,73.608 168.105,69.766 172.023,65.848 181.005,65.848 181.133,65.976 181.292,65.976 181.61,66.294 185.166,66.294 187.071,68.199 187.071,70.485 192.004,75.418 192.102,75.418 ; v1(199.136,98.171) 199.136,97.282 S&H.1@201.041,95.377 Ccoup1-S&H.1@197.485,95.377 193.294,95.377 190.881,92.964 190.881,87.772 190.903,87.75 190.903,85.732 190.881,85.71 190.881,83.82 192.913,81.788 RVar-S&H.3@193.802,81.788 193.802,80.948 193.098,80.948 192.102,79.952 192.102,75.418 ; v1(199.136,102.87) 208.153,102.87 210.101,104.818 210.101,122.249 211.455,123.603 211.455,128.524 ; v1(211.455,129.159) 211.455,128.524 ; v1(211.455,137.668) 211.455,143.002 213.487,145.034 233.172,145.034 233.553,144.653 v1(233.553,143.637) ; DAC_ADA.13@213.614,127.762 212.217,127.762 211.455,128.524 ; Divisor10V_ADC_R1.2@218.948,74.041 215.265,74.041 C_decoupDACBuffer.2@214.122,72.898 214.122,70.485 212.174,68.537 212.142,68.537 209.598,65.992 204.01,65.992 201.549,68.453 BUFFER_ADC2.8@201.549,69.088 201.549,69.215 197.823,72.941 194.579,72.941 192.102,75.418 ; v1(233.553,140.335) 233.553,136.017 234.696,134.874 ADA_Opamp.8@236.347,134.874
-5V: Ccoup2-Filter.2 Ccoup-F2b.2 Ccoupvcc7.1 filtro2.2 R3.1 U1.2 U-5V.3 | length 331.8
  Top Layer w0.8: U-5V.3@57.023,86.233 57.023,88.138 59.69,90.805 59.69,95.504 72.263,108.077 Ccoup2-Filter.2@73.787,108.077 ; 102.616,143.637 102.616,137.795 103.378,137.033 R3.1@104.775,137.033 ; 102.616,143.764 103.505,144.653 v1(110.998,144.653)
  Bottom Layer w0.8: Ccoup2-Filter.2@73.787,108.077 73.914,107.95 75.946,107.95 76.835,108.839 76.835,123.698 79.121,125.984 93.853,125.984 94.107,126.238 94.107,128.524 ; U1.2@80.264,134.239 82.042,134.239 82.804,133.477 82.804,130.81 83.82,129.794 92.837,129.794 94.107,128.524 ; R3.1@104.775,137.033 104.775,135.636 97.663,128.524 94.107,128.524 ; v1(110.998,144.653) 112.903,146.558 163.798,146.558 164.306,147.066 184.563,147.066 185.071,146.558 247.269,146.558 249.428,144.399 249.428,107.442 247.523,105.537 242.316,105.537 240.792,104.013 filtro2.2@240.792,102.997 240.792,102.235 239.854,101.297 236.269,101.297 233.68,103.886 229.108,103.886 228.6,103.378 Ccoupvcc7.1@228.6,101.473 228.6,93.726 Ccoup-F2b.2@228.219,93.345
-15V: ADA_Opamp.4 C_comp_DAC.1 Ccoup2-S&H.1 Ccoupvcc5.1 DAC_ADA.3 DAC_ADA_cap.2 DAC_fpga.3 S&H.4 U-15V.3 UOFF.4 | length 336.5
  Top Layer w0.8: Ccoupvcc5.1@61.214,110.617 73.66,110.617 77.929,106.348 89.858,106.348 91.099,105.107 95.192,105.107 95.241,105.156 97.663,105.156 ; v1(120.396,103.886) 103.251,103.886 101.981,105.156 97.663,105.156 ; v1(123.317,135.763) 118.093,135.763 116.364,134.034 115.247,134.034 114.251,133.038 114.251,130.498 105.41,121.657 105.41,121.158 99.187,114.935 99.187,106.68 97.663,105.156 ; v1(124.079,97.536) 146.939,97.536 152.146,92.329 182.88,92.329 v1(188.468,86.741) ; v1(188.468,83.693) v1(188.468,86.741) ; C_comp_DAC.1@208.026,78.613 205.607,81.032 199.246,81.032 199.24,81.026 199.136,81.026 193.421,86.741 v1(188.468,86.741) ; v1(223.774,125.222) 223.823,125.271 226.519,125.271 227.711,124.079 227.711,122.047 228.981,120.777 DAC_ADA_cap.2@230.759,120.777
  Bottom Layer w0.8: U-15V.3@57.023,109.347 58.293,110.617 Ccoupvcc5.1@61.214,110.617 ; v1(120.396,103.886) 120.396,101.219 v1(124.079,97.536) ; v1(123.317,135.763) 123.571,135.509 UOFF.4@123.571,132.334 ; DAC_fpga.3@172.212,74.549 173.196,74.549 174.388,73.357 177.624,73.357 181.024,76.757 186.104,76.757 188.468,79.121 v1(188.468,83.693) ; v1(188.468,86.741) 188.468,87.249 187.26,88.457 187.26,97.09 191.008,100.838 210.185,100.838 211.455,102.108 211.455,108.966 212.852,110.363 217.297,110.363 217.551,110.617 217.551,114.046 219.71,116.205 219.71,119.262 219.534,119.438 219.534,120.846 219.71,121.022 219.71,121.802 219.534,121.978 219.534,123.522 DAC_ADA.3@221.234,125.222 v1(223.774,125.222) ; Ccoup2-S&H.1@193.675,86.868 197.231,86.868 198.12,87.757 S&H.4@201.041,87.757 ; ADA_Opamp.4@228.727,127.254 228.727,122.809 DAC_ADA_cap.2@230.759,120.777
ADC_input_ADA: ADC_integrado.26 D1OFF.1 D2OFF.2 R1.1 S&H.3 UOFF.7 | length 317.5
  Top Layer w0.8: v1(62.611,50.546) v1(62.611,54.356) ; v1(96.901,130.175) 98.806,128.27 v1(104.648,128.27) ; R1.1@111.76,123.444 111.379,123.063 D1OFF.1@111.379,116.967 125.013,103.333 138.241,103.333 138.814,103.906 158.603,103.906 159.301,103.208 161.137,103.208 161.245,103.316 162.605,103.316 162.713,103.208 169.646,103.208 169.881,103.443 v1(176.214,103.443) ; v1(179.451,103.378) 185.547,103.378 195.707,93.218 197.612,93.218 200.533,90.297 S&H.3@201.041,90.297
  Bottom Layer w0.8: ADC_integrado.26@61.849,64.77 62.103,64.77 64.389,62.484 64.389,56.007 v1@62.611,54.229 ; v1(62.611,50.546) 57.277,50.546 53.721,54.102 53.721,94.107 52.324,95.504 52.324,135.763 62.357,145.796 90.297,145.796 90.932,146.431 92.837,146.431 93.599,145.669 93.599,139.319 88.9,134.62 88.9,133.477 90.551,131.826 93.98,131.826 95.631,130.175 v1(96.901,130.175) ; v1(104.648,128.27) 107.188,125.73 D2OFF.2@107.188,120.523 108.839,120.523 109.728,121.412 109.728,122.936 110.236,123.444 R1.1@111.76,123.444 ; R1.1@111.379,123.063 R1.1@111.76,123.444 ; UOFF.7@115.951,127.254 114.427,127.254 114.046,126.873 114.046,125.73 R1.1@111.76,123.444 ; v1(176.214,103.443) 176.279,103.378 v1(179.451,103.378)
ADC_OUT2: DAC_fpga.6 FPGA.14 R_ADC_D2.2 | length 80.5
  Bottom Layer w0.8: FPGA.14@116.84,64.77 116.84,65.61 127.505,65.61 136.364,74.469 136.364,76.068 136.63,76.334 136.63,78.479 138.056,79.905 150.326,79.905 163.469,93.048 165.714,93.048 168.361,90.401 168.361,86.877 170.512,84.726 170.512,84.005 DAC_fpga.6@172.212,82.305 ; DAC_fpga.6@172.212,82.169 DAC_fpga.6@172.212,82.305 ; DAC_fpga.6@172.28,82.237 DAC_fpga.6@172.212,82.305 ; 172.949,81.432 R_ADC_D2.2@176.53,81.432
ADC_OUT3: DAC_fpga.7 FPGA.12 R_ADC_D3.2 | length 78.9
  Bottom Layer w0.8: FPGA.12@116.84,67.31 127.65,67.31 135.264,74.924 135.264,76.524 135.53,76.79 135.53,78.934 137.601,81.005 149.871,81.005 163.014,94.148 166.329,94.148 169.461,91.016 169.461,88.444 169.672,88.233 169.672,87.249 DAC_fpga.7@172.212,84.709 ; DAC_fpga.7@172.288,84.785 R_ADC_D3.2@176.53,84.785
ADC_OUT4: DAC_fpga.8 FPGA.10 R_ADC_D4.2 | length 78.2
  Bottom Layer w0.8: FPGA.10@116.84,69.85 117.824,69.85 118.289,69.385 126.593,69.385 126.828,69.15 127.934,69.15 134.164,75.38 134.164,76.979 134.43,77.245 134.43,79.39 137.145,82.105 149.415,82.105 162.558,95.248 166.785,95.248 170.561,91.472 170.561,88.9 DAC_fpga.8@172.212,87.249 173.101,88.138 R_ADC_D4.2@176.53,88.138
ADC_OUT5: DAC_fpga.9 FPGA.8 R_ADC_D5.2 | length 60.9
  Top Layer w0.8: v1(127.381,70.485) 127.635,70.739 139.7,70.739 140.335,71.374 v1(142.494,71.374)
  Bottom Layer w0.8: FPGA.8@116.84,72.39 118.745,70.485 v1(127.381,70.485) ; v1(142.494,71.374) 143.383,71.374 145.288,73.279 154.051,73.279 158.242,77.47 158.242,79.47 160.233,81.461 160.233,84.065 163.417,87.249 DAC_fpga.9@164.592,87.249 ; DAC_fpga.9@164.719,87.376 R_ADC_D5.2@164.719,90.083
ADC_OUT6: DAC_fpga.10 FPGA.6 R_ADC_D6.2 | length 61.4
  Top Layer w0.8: v1(125.73,72.517) 126.169,72.517 126.847,71.839 137.117,71.839 138.303,73.025 v1(141.224,73.025)
  Bottom Layer w0.8: FPGA.6@116.84,74.93 117.094,74.676 R_ADC_D6.2@121.158,74.676 121.158,74.295 122.936,72.517 v1(125.73,72.517) v1@125.857,72.517 ; v1(141.224,73.025) 140.97,72.771 140.97,70.993 141.924,70.039 143.699,70.039 145.796,72.136 154.464,72.136 159.342,77.014 159.342,79.014 161.333,81.005 161.333,82.244 161.417,82.328 161.417,83.693 162.433,84.709 DAC_fpga.10@164.592,84.709
ADC_OUT7: DAC_fpga.11 FPGA.4 R_ADC_D7.2 | length 62.6
  Top Layer w0.8: R_ADC_D7.2@121.158,77.724 123.19,75.692 124.714,75.692 127.43,72.976 129.482,72.976 131.11,74.604 v1(139.899,74.604)
  Bottom Layer w0.8: FPGA.4@116.84,77.47 117.094,77.724 R_ADC_D7.2@121.158,77.724 ; v1(139.899,74.604) 139.899,73.588 139.87,73.559 139.87,70.537 141.468,68.939 144.155,68.939 146.082,70.866 154.749,70.866 160.442,76.559 160.442,78.559 162.433,80.55 162.433,81.788 162.814,82.169 DAC_fpga.11@164.592,82.169
CLK0: CLK_RES0.1 ClockSwitch.16 FPGA.1 | length 17.3
  Bottom Layer w0.8: CLK_RES0.1@107.886,84.582 ClockSwitch.16@103.378,84.582 107.95,80.01 FPGA.1@114.3,80.01
CLK1: CLK_RES1.1 ClockSwitch.15 FPGA.3 | length 33
  Bottom Layer w0.8: CLK_RES1.1@111.76,84.582 111.76,87.63 110.998,88.392 102.87,88.392 101.219,86.741 101.219,84.201 ClockSwitch.15@103.378,82.042 107.95,77.47 FPGA.3@114.3,77.47
CLK2: CLK_RES2.1 ClockSwitch.14 FPGA.5 | length 43.3
  Bottom Layer w0.8: FPGA.5@114.3,74.93 107.95,74.93 ClockSwitch.14@103.378,79.502 99.822,83.058 99.822,87.249 102.065,89.492 114.279,89.492 116.649,87.122 CLK_RES2.1@116.649,84.582
CLK3: CLK_RES3.1 ClockSwitch.13 FPGA.7 | length 35.1
  Bottom Layer w0.8: CLK_RES3.1@95.25,58.674 95.25,59.944 97.547,62.241 97.547,70.147 101.6,74.2 101.6,76.327 102.235,76.962 ClockSwitch.13@103.378,76.962 107.95,72.39 FPGA.7@114.3,72.39
CLK4: CLK_RES4.1 ClockSwitch.12 FPGA.9 | length 30.5
  Bottom Layer w0.8: CLK_RES4.1@98.647,58.674 98.647,69.691 ClockSwitch.12@103.378,74.422 107.95,69.85 FPGA.9@114.3,69.85
CLK5: CLK_RES5.1 ClockSwitch.11 FPGA.11 | length 28.7
  Bottom Layer w0.8: CLK_RES5.1@102.044,58.674 102.042,58.676 102.042,64.112 101.976,64.178 101.652,64.178 100.119,65.711 100.119,69.163 101.503,70.546 102.042,70.546 ClockSwitch.11@103.378,71.882 107.95,67.31 FPGA.11@114.3,67.31
CLK6: CLK_RES6.1 ClockSwitch.10 FPGA.13 | length 27.8
  Bottom Layer w0.8: CLK_RES6.1@105.442,58.674 105.442,63.214 103.554,65.102 102.674,65.102 102.498,65.278 102.108,65.278 101.219,66.167 101.219,68.707 101.854,69.342 ClockSwitch.10@103.378,69.342 103.41,69.342 107.982,64.77 FPGA.13@114.3,64.77
CLK7: CLK_RES7.1 ClockSwitch.9 FPGA.15 | length 16.5
  Bottom Layer w0.8: ClockSwitch.9@103.378,66.802 104.394,66.802 108.839,62.357 ; CLK_RES7.1@108.839,58.674 108.839,62.357 ; FPGA.15@114.3,62.23 108.966,62.23 108.839,62.357
Comp_Dac_del_ADC: C_comp_DAC.2 DAC_fpga.16 | length 46.6
  Top Layer w0.8: v1(192.278,71.882) 193.675,71.882 C_comp_DAC.2@200.406,78.613
  Bottom Layer w0.8: DAC_fpga.16@164.592,69.469 164.592,69.215 170.205,63.602 185.967,63.602 187.606,65.241 189.32,65.241 191.348,67.269 191.348,68.348 192.278,69.278 v1@192.278,71.755
Comp_fpga: Comparador.1 FPGA.18 | length 135.9
  Top Layer w0.8: v1(211.074,54.102) 211.201,53.975 v1(217.17,53.975)
  Bottom Layer w0.8: FPGA.18@116.84,59.69 120.904,59.69 122.428,61.214 133.604,61.214 139.192,66.802 140.494,66.802 140.557,66.739 145.066,66.739 145.129,66.802 159.639,66.802 165.227,61.214 165.227,57.023 167.767,54.483 171.831,54.483 173.101,53.213 210.185,53.213 v1(211.074,54.102) ; v1(217.17,53.975) 222.25,59.055 232.759,59.055 232.843,59.139 235.161,59.139 236.728,60.706 236.728,61.722 Comparador.1@237.236,62.23
D1_ADA: ADC_integrado.21 Latch_leds.3 R_ADC_D1.1 | length 171.7
  Top Layer w0.8: v1@77.173,97.833 v1(77.089,97.917) 78.867,97.917 79.439,98.489 94.122,98.489 94.757,99.124 95.773,99.124 95.963,99.314 97.426,99.314 97.618,99.506 98.724,99.506 99.297,98.933 140.064,98.933 140.445,99.314 154.559,99.314 v1(156.718,97.155) v1(165.354,97.155)
  Bottom Layer w0.8: ADC_integrado.21@61.849,77.47 65.405,77.47 73.299,85.364 73.299,94.127 v1(77.089,97.917) ; Latch_leds.3@140.099,106.985 149.929,97.155 v1(156.718,97.155) ; v1(165.354,97.155) 174.752,97.155 179.451,92.456 179.451,83.312 R_ADC_D1.1@184.15,78.613
D2_ADA: ADC_integrado.20 Latch_leds.4 R_ADC_D2.1 | length 169.1
  Top Layer w0.8: v1(76.454,99.822) 77.024,99.252 77.642,99.252 77.979,99.589 93.666,99.589 94.301,100.224 95.317,100.224 95.507,100.414 96.97,100.414 97.162,100.606 99.18,100.606 99.753,100.033 139.608,100.033 140.181,100.606 156.696,100.606 v1(158.369,98.933) v1(167.132,98.933)
  Bottom Layer w0.8: ADC_integrado.20@61.849,80.01 65.786,80.01 72.199,86.423 72.199,94.583 73.279,95.663 73.279,96.647 v1(76.454,99.822) ; Latch_leds.4@142.639,106.985 150.691,98.933 v1(158.369,98.933) ; v1(167.132,98.933) 175.133,98.933 181.018,93.048 181.018,84.564 R_ADC_D2.1@184.15,81.432
D3_ADA: ADC_integrado.19 Latch_leds.7 R_ADC_D3.1 | length 161
  Top Layer w0.8: v1(75.565,101.6) 76.008,101.157 77.007,101.157 77.475,100.689 93.211,100.689 93.846,101.324 94.862,101.324 95.052,101.514 96.515,101.514 96.707,101.706 99.635,101.706 100.208,101.133 139.152,101.133 139.725,101.706 157.152,101.706 158.02,100.838 160.02,100.838 v1(160.274,100.584) v1(168.783,100.584)
  Bottom Layer w0.8: ADC_integrado.19@61.849,82.55 66.04,82.55 71.099,87.609 71.099,96.023 73.914,98.838 73.914,99.949 v1(75.565,101.6) ; Latch_leds.7@150.259,106.985 156.66,100.584 v1(160.274,100.584) ; v1(168.783,100.584) 175.641,100.584 182.118,94.107 182.118,86.817 R_ADC_D3.1@184.15,84.785
D4_ADA: ADC_integrado.18 Latch_leds.8 R_ADC_D4.1 | length 157.6
  Top Layer w0.8: v1(73.279,102.743) 74.82,102.743 75.012,102.935 76.785,102.935 77.931,101.789 92.755,101.789 93.39,102.424 94.406,102.424 94.596,102.614 96.059,102.614 96.251,102.806 100.091,102.806 100.664,102.233 138.697,102.233 139.27,102.806 157.607,102.806 158.432,101.981 v1(161.925,101.981) 170.307,101.981 v1(170.434,102.108)
  Bottom Layer w0.8: ADC_integrado.18@61.849,85.09 65.405,85.09 69.999,89.684 69.999,96.478 72.706,99.185 72.706,101.01 73.279,101.583 v1(73.279,102.743) ; Latch_leds.8@152.799,106.985 157.803,101.981 v1(161.925,101.981) ; v1(170.434,102.108) 176.022,102.108 184.15,93.98 R_ADC_D4.1@184.15,88.138
D5_ADA: ADC_integrado.8 Latch_leds.13 R_ADC_D5.1 | length 166
  Top Layer w0.8: v1(80.137,77.47) v1(83.439,80.772) ; v1(117.934,93.902) v1(124.714,87.122) ; v1(151.257,116.586) 156.788,116.586 156.896,116.478 160.246,116.478 163.703,113.021 163.703,105.664 164.387,104.98 166.457,104.98 166.506,105.029 168.774,105.029 168.823,104.98 170.231,104.98 170.28,105.029 172.547,105.029 172.596,104.98 174.005,104.98 174.054,105.029 176.321,105.029 176.37,104.98 177.087,104.98 178.054,104.013 178.054,96.774 176.784,95.504 v1(155.321,95.504)
  Bottom Layer w0.8: ADC_integrado.8@77.089,77.47 v1(80.137,77.47) ; v1(83.439,80.772) 88.958,80.772 94.468,86.282 97.331,86.282 98.722,87.673 98.722,87.705 104.919,93.902 108.591,93.902 108.64,93.853 111.515,93.853 111.564,93.902 112.972,93.902 113.021,93.853 115.896,93.853 115.945,93.902 v1(117.934,93.902) ; v1(124.714,87.122) 146.939,87.122 v1(155.321,95.504) ; v1@151.384,116.332 152.799,114.917 Latch_leds.13@152.799,114.605 ; R_ADC_D5.1@172.339,90.083 v1(172.339,95.377)
D6_ADA: ADC_integrado.15 Latch_leds.14 R_ADC_D6.1 | length 176.5
  Top Layer w0.8: v1(67.564,96.139) 69.088,94.615 v1(82.169,94.615)
  Bottom Layer w0.8: ADC_integrado.15@61.849,92.71 65.278,96.139 v1(67.564,96.139) ; v1(82.169,94.615) 85.09,94.615 85.557,95.082 91.843,95.082 93.834,93.091 102.553,93.091 104.464,95.002 109.046,95.002 109.095,94.953 111.059,94.953 111.108,95.002 113.428,95.002 113.477,94.953 115.441,94.953 115.49,95.002 117.146,95.002 117.381,95.237 118.504,95.237 120.523,93.218 120.523,84.582 125.603,79.502 125.603,77.851 R_ADC_D6.1@128.778,74.676 130.302,76.2 130.302,77.049 130.478,77.225 130.478,78.027 135.656,83.205 148.769,83.205 169.444,103.88 173.349,103.88 175.055,105.586 175.055,107.774 171.88,110.949 156.989,110.949 155.953,111.985 150.905,111.985 150.259,112.631 Latch_leds.14@150.259,114.605
D7_ADA: ADC_integrado.14 Latch_leds.17 R_ADC_D7.1 | length 156.1
  Bottom Layer w0.8: ADC_integrado.14@77.089,92.71 80.561,96.182 92.299,96.182 94.29,94.191 102.097,94.191 104.008,96.102 109.502,96.102 109.551,96.053 110.604,96.053 110.653,96.102 113.883,96.102 113.932,96.053 114.985,96.053 115.034,96.102 116.69,96.102 116.925,96.337 118.96,96.337 121.623,93.674 121.623,93.007 121.836,92.794 121.836,84.888 123.115,83.609 124.036,83.609 126.365,81.28 126.365,80.518 R_ADC_D7.1@128.778,78.105 134.978,84.305 148.313,84.305 168.988,104.98 170.231,104.98 171.266,106.015 171.266,108.134 169.615,109.785 156.597,109.785 155.497,110.885 148.35,110.885 146.33,112.905 144.475,112.905 144.395,112.985 143.047,112.985 142.639,113.393 Latch_leds.17@142.639,114.605
D8_ADA: ADC_integrado.17 Latch_leds.18 R_ADC_D8.1 | length 182.7
  Bottom Layer w0.6: 139.232,111.985 139.312,111.905 144.926,111.905 145.875,110.956
  Bottom Layer w0.8: ADC_integrado.17@61.849,87.63 65.786,87.63 68.899,90.743 68.899,96.934 71.606,99.641 71.606,103.229 72.517,104.14 78.835,104.14 82.221,100.754 82.507,100.754 85.979,97.282 92.755,97.282 94.746,95.291 101.641,95.291 103.552,97.202 109.958,97.202 110.007,97.153 110.148,97.153 110.197,97.202 114.339,97.202 114.388,97.153 114.529,97.153 114.578,97.202 116.235,97.202 116.47,97.437 119.415,97.437 122.723,94.129 122.723,93.463 122.936,93.25 122.936,85.344 123.571,84.709 126.873,84.709 128.778,82.804 R_ADC_D8.1@128.778,80.772 133.604,85.598 147.828,85.598 167.767,105.537 167.767,107.442 166.524,108.685 156.142,108.685 155.042,109.785 151.639,109.785 151.54,109.685 151.519,109.685 151.419,109.785 149.099,109.785 149,109.685 148.979,109.685 148.879,109.785 147.895,109.785 146.795,110.885 145.875,110.885 145.875,110.956 ; 139.232,111.985 138.43,112.786 138.43,112.936 Latch_leds.18@140.099,114.605
Delta/SAR: Oe_Schmitt_trigger.6 PinsAdicionales_FPGA.1 | length 119.8
  Top Layer w0.8: v1(217.805,61.849) 217.805,63.324 219.202,64.721 219.652,64.721 219.701,64.77 223.901,64.77 227.457,68.326 227.457,70.335 226.943,70.849 226.943,73.169 225.95,74.162 223.884,74.162 222.244,75.802 222.244,77.222 220.45,79.016 220.45,81.146 220.853,81.549 220.853,89.154 218.694,91.313 v1(218.694,92.075)
  Bottom Layer w0.8: Oe_Schmitt_trigger.6@153.67,51.181 155.37,49.481 209.628,49.481 217.805,57.658 v1(217.805,61.849) ; v1(218.694,92.075) 219.71,93.091 PinsAdicionales_FPGA.1@219.71,96.901
E0_DAC_ADC: Comparador.6 DAC_fpga.2 E0_ADC_R1.2 | length 68.4
  Top Layer w0.8: v1(184.785,68.326) 186.309,66.802 v1(186.309,60.071)
  Bottom Layer w0.8: DAC_fpga.2@172.847,71.374 E0_ADC_R1.2@176.53,71.374 178.689,71.374 181.737,68.326 v1(184.785,68.326) ; v1(186.309,60.071) 188.552,57.828 196.045,57.828 198.888,54.985 208.814,54.985 209.819,55.99 210.667,55.99 211.758,57.081 211.758,57.69 217.252,63.184 218.358,63.184 221.471,60.071 221.71,60.071 221.794,60.155 222.461,60.155 Comparador.6@224.536,62.23